# Altium PCB 256ch Adaptor PCB_TY.PcbDoc (part 2 of 2)
Units mm, origin at the board's own origin, x right, y up, seen from the top; angles counter-clockwise.
Board outline 152.4 x 101.6 mm, 4 copper layers (Top Layer, Signal Layer 1, Signal Layer 2, Bottom Layer), stack 0.778 mm thick; 1 components, 288 nets, 677 pads, 414 vias.
Unrouted connection lines stored in the file: 11.
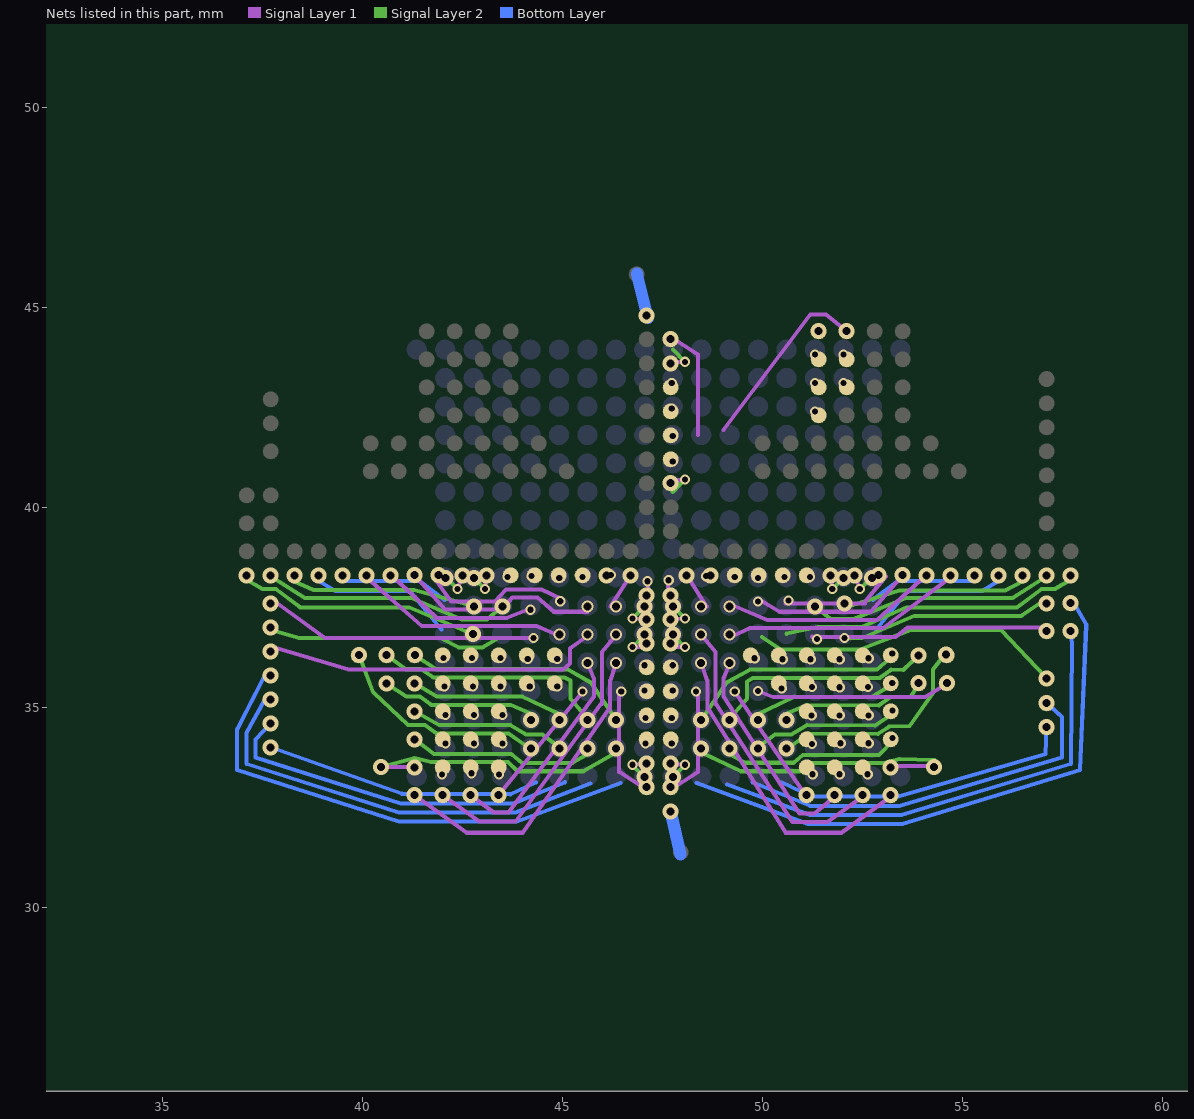
[diagram p4: the nets of this part, all layers, seen from the top]

## Via types
v1: diameter 0.254, hole 0.152, Top Layer to Bottom Layer, 167 vias
v2: diameter 0.4, hole 0.2, Top Layer to Bottom Layer, 77 vias
v3: diameter 0.4, hole 0.2, Top Layer to Signal Layer 1, 72 vias
v4: diameter 0.4, hole 0.2, Signal Layer 2 to Bottom Layer, 70 vias
v5: diameter 0.3, hole 0.2, Top Layer to Bottom Layer, 26 vias
v6: diameter 0.254, hole 0.152, Signal Layer 2 to Bottom Layer, 2 vias

## Nets (pads, with @x,y where several pads share a name; then routed paths per layer and width w, separated by ;. In a path a pad name is that pad's centre, name@x,y a point inside that pad or via, vN(x,y) a via of type N, cw(c..) or ccw(c..) an arc to the next point about the centre after c; other vN are vias at no path point) (continued)
IN114: pad.0@47.7,40.6 pad.0@48.057,40.691 | length 0.8
  Signal Layer 1 w0.102: v3@47.701,40.686 pad.0@48.057,40.686
  Signal Layer 2 w0.102: 47.752,40.381 pad.0@48.082,40.737
  other v1: 48.057,40.691
  other v3: 47.701,40.602
IN115: pad.0@51.4,42.3
  other v1: 51.308,42.393
IN116: pad.0@47.7,41.2
  other v1: 47.752,41.148
IN117: pad.0@52.1,43
  other v1: 52.019,43.104
IN118: pad.0@47.7,41.8
  other v1: 47.752,41.783
IN119: pad.0@51.4,43
  other v1: 51.308,43.104
IN120: pad.0@47.7,42.4
  other v1: 47.727,42.469
IN121: pad.0@52.1,43.7
  other v1: 52.019,43.815
IN122: pad.0@47.7,43
  other v1: 47.727,43.104
IN123: pad.0@51.4,43.7
  other v1: 51.308,43.815
IN124: pad.0@47.7,43.6 pad.0@48.057,43.632 pad.0@48.057,43.642 | length 0.8
  Signal Layer 1 w0.102: v3@47.701,43.632 pad.0@48.057,43.632
  Signal Layer 2 w0.102: 47.757,43.942 pad.0@48.062,43.637
  other v1: 48.057,43.637
  other v3: 47.701,43.599
IN125: pad.0@52.1,44.4 | length 4.7
  Signal Layer 1 w0.102: 49.022,41.935 51.194,44.825 51.575,44.825 v3@52.1,44.4
  other v3: 52.1,44.405
IN126: pad.0@47.7,44.2 pad.0@48.336,41.808 | length 2.8
  Signal Layer 1 w0.102: v3@47.696,44.266 48.387,43.815 pad.0@48.387,41.808
  other v3: 47.7,44.205
IN127: pad.0@51.4,44.4
  other v3: 51.4,44.405
IN128: pad.0@49.301,35.392 pad.0@51.1,32.8 | length 3.2
  Signal Layer 1 w0.102: v1(49.301,35.392) v3@51.093,32.775
  other v3: 51.1,32.805
IN129: pad.0@47.7,33 pad.0@48.336,35.392 | length 2.8
  Signal Layer 1 w0.102: v3@47.696,32.934 48.387,33.385 pad.0@48.387,35.392
  other v1: 48.336,35.392
  other v3: 47.7,33.005
IN130: pad.0@49.174,36.103 pad.0@51.8,32.8 | length 5.4
  Signal Layer 1 w0.102: 49.017,35.265 49.022,35.722 v5(49.174,36.103) ; 49.022,35.265 50.919,32.35 51.3,32.35 v3@51.846,32.8
  other v3: 51.8,32.805
IN131: pad.0@47.7,33.6 pad.0@48.057,33.563 pad.0@48.057,33.568 | length 0.8
  Signal Layer 1 w0.102: v3@47.701,33.568 pad.0@48.057,33.568
  Signal Layer 2 w0.102: v4@47.757,33.258 pad.0@48.062,33.563
  other v1: 48.057,33.563
  other v3: 47.701,33.601
  other v4: 47.752,33.258
IN132: pad.0@51.1,33.5
  other v1: 51.25,33.325
IN133: pad.0@47.7,34.2
  other v1: 47.727,34.096
IN134: pad.0@51.8,33.5
  other v1: 51.925,33.325
IN135: pad.0@47.7,34.8
  other v1: 47.727,34.731
IN136: pad.0@51.1,34.2
  other v1: 51.232,34.087
IN137: pad.0@47.7,35.4
  other v1: 47.752,35.417
IN138: pad.0@51.8,34.2
  other v1: 51.95,34.1
IN139: pad.0@47.7,36
  other v1: 47.752,36.052
IN140: pad.0@51.1,34.9
  other v1: 51.225,34.8
IN141: pad.0@47.7,36.6 pad.0@48.057,36.507 pad.0@48.057,36.514 | length 0.8
  Signal Layer 1 w0.102: v3@47.701,36.514 pad.0@48.057,36.514
  Signal Layer 2 w0.102: v4@47.752,36.819 pad.0@48.082,36.463
  other v1: 48.057,36.509
  other v3: 47.701,36.598
  other v4: 47.752,36.814
IN142: pad.0@51.8,34.9
  other v1: 51.925,34.8
IN143: pad.0@47.7,37.2 pad.0@48.057,37.22 pad.0@48.057,37.225 | length 0.8
  Signal Layer 1 w0.102: v3(47.701,37.2) pad.0@48.057,37.225
  Signal Layer 2 w0.102: v4@47.752,37.53 pad.0@48.057,37.225
  other v1: 48.057,37.22
  other v4: 47.752,37.525
IN144: pad.0@47.7,37.8 pad.0@47.65,38.176 | length 0.4
  Signal Layer 1 w0.102: v3@47.621,37.849 pad.0@47.646,38.126 ; v3@47.621,37.849 47.622,37.92 v3@47.65,37.891
  other v1: 47.65,38.176
  other v3: 47.701,37.8
IN145: pad.0@49.7,36.3
  other v1: 49.8,36.225
IN146: pad.0@48.1,38.3 pad.0@48.463,37.52 | length 0.9
  Signal Layer 1 w0.102: v3(48.1,38.3) pad.0@48.605,37.517
  other v5: 48.463,37.525
IN147: pad.0@50.4,35.6
  other v1: 50.475,35.475
IN148: pad.0@48.7,38.3
  other v1: 48.59,38.278
  other v3: 48.7,38.3
IN149: pad.0@50.4,36.3
  other v1: 50.5,36.2
IN150: pad.0@49.3,38.3
  other v1: 49.301,38.262
IN151: pad.0@51.1,36.3
  other v1: 51.2,36.2
IN152: pad.0@49.9,38.3
  other v1: 49.886,38.236
IN153: pad.0@51.1,35.6
  other v1: 51.233,35.506
IN154: pad.0@50.5,38.3
  other v1: 50.546,38.262
IN155: pad.0@51.8,36.3
  other v1: 51.925,36.2
IN156: pad.0@51.1,38.3
  other v1: 51.181,38.262
IN157: pad.0@51.8,35.6
  other v1: 51.925,35.5
IN158: pad.0@51.7,38.3 pad.0@51.74,37.957 pad.0@51.74,37.962 | length 0.7
  Signal Layer 1 w0.102: v3@51.7,38.305 pad.0@51.74,37.962
  Signal Layer 2 w0.102: pad.0@51.74,37.962 v4@52.019,38.241
  other v1: 51.74,37.957
  other v3: 51.7,38.3
  other v4: 52.019,38.236
IN159: pad.0@52.5,36.3
  other v1: 52.65,36.225
IN160: pad.0@52.3,38.3 pad.0@52.426,37.957 pad.0@52.426,37.962 | length 0.8
  Signal Layer 1 w0.102: v3@52.3,38.305 pad.0@52.426,37.962
  Signal Layer 2 w0.102: pad.0@52.426,37.962 v4@52.73,38.241
  other v1: 52.426,37.957
  other v3: 52.3,38.3
  other v4: 52.73,38.236
IN161: pad.0@50.648,37.678 pad.0@52.9,38.3 | length 2.8
  Signal Layer 1 w0.102: pad.0@50.571,37.592 52.553,37.592 ; 52.527,37.601 v3@53.077,38.273
  other v1: 50.648,37.668
  other v3: 52.9,38.305
IN162: pad.0@52.5,35.6
  other v1: 52.63,35.506
IN163: pad.0@49.886,37.652 pad.0@53.5,38.3 | length 4
  Signal Layer 1 w0.102: pad.0@49.962,37.668 50.419,37.389 52.705,37.389 ; 52.705,37.398 v3@53.5,38.3
  other v1: 49.886,37.643
  other v3: 53.5,38.305
IN164: pad.0@53.2,36.3 pad.0@53.239,36.344 | length 5.5
  Signal Layer 2 w0.102: v4(48.463,34.68) 49.098,35.62 49.682,35.941 52.857,35.941 pad.0@53.264,36.297
  other v1: 53.239,36.344
IN165: pad.0@49.174,37.535 pad.0@54.1,38.3 | length 5.3
  Signal Layer 1 w0.102: pad.0@49.276,37.541 50.114,37.186 52.857,37.186 v3@54.084,38.3
  other v3: 54.1,38.3
  other v5: 49.174,37.525
IN166: pad.0@53.2,35.6 pad.0@53.239,35.608 | length 3.7
  Signal Layer 2 w0.102: v4@49.784,34.782 50.8,35.265 52.706,35.252 pad.0@53.265,35.582
  other v1: 53.239,35.608
  other v4: 49.886,34.68
IN167: pad.0@49.174,36.814 pad.0@54.7,38.3 | length 6
  Signal Layer 1 w0.102: pad.0@49.251,36.779 49.682,36.982 53.01,36.982 v3@54.782,38.313
  other v3: 54.7,38.3
  other v5: 49.174,36.814
IN168: pad.0@53.9,36.3 pad.0@53.9,36.293 | length 5.7
  Signal Layer 2 w0.102: v4@49.149,34.68 49.606,35.214 49.606,35.636 49.759,35.738 52.934,35.738 53.213,35.941 53.519,35.938 v2(53.9,36.293)
  other v4: 49.174,34.68
IN169: pad.0@55.3,38.3 | length 2.7
  Bottom Layer w0.102: 52.76,37.685 53.391,38.16 v2@55.296,38.16
  other v2: 55.3,38.3
IN170: pad.0@53.9,35.6 pad.0@53.9,35.608 | length 3.7
  Signal Layer 2 w0.102: v4@50.521,34.807 51.105,35.061 52.909,35.049 53.188,35.252 53.696,35.265 pad.0@53.929,35.628
  other v2: 53.9,35.608
  other v4: 50.597,34.68
IN171: pad.0@55.9,38.3 | length 3.6
  Bottom Layer w0.102: 52.832,36.941 53.619,37.906 55.474,37.906 v2@55.905,38.16
  other v2: 55.9,38.3
IN172: pad.0@54.6,36.3 pad.0@54.585,36.319 | length 5.3
  Signal Layer 2 w0.102: v4@50.622,33.969 51.156,34.35 52.884,34.338 53.163,34.515 53.67,34.528 54.255,35.354 54.255,35.938 pad.0@54.539,36.306
  other v2: 54.585,36.319
  other v4: 50.597,33.969
IN173: pad.0@56.5,38.3 pad.0@56.501,38.297 | length 4.6
  Signal Layer 2 w0.102: v4@52.019,37.479 53.416,37.922 56.058,37.922 pad.0@56.505,38.147
  other v2: 56.5,38.3
  other v4: 52.045,37.592
IN174: pad.0@49.886,35.404 pad.0@54.6,35.6 pad.0@54.611,35.608 | length 4.9
  Signal Layer 1 w0.102: pad.0@49.899,35.404 50.267,35.252 54.052,35.252 pad.0@54.624,35.607
  other v1: 49.886,35.404
  other v2: 54.611,35.608
IN175: pad.0@57.1,38.3 | length 6.1
  Signal Layer 2 w0.102: v4(51.308,37.525) 51.689,37.211 52.273,37.211 53.569,37.728 56.236,37.728 pad.0@57.021,38.223
  other v2: 57.1,38.3
IN176: pad.0@57.7,38.3 | length 7.4
  Signal Layer 2 w0.102: 50.597,36.839 51.384,37.008 52.476,37.008 53.594,37.5 56.363,37.5 56.972,37.957 57.302,37.957 pad.0@57.704,38.186
  other v2: 57.7,38.3
IN177: pad.0@52.5,34.9
  other v1: 52.65,34.8
IN178: pad.0@57.1,37.6 | length 5.3
  Signal Layer 2 w0.102: v6(52.045,36.728) 52.476,36.728 53.797,37.287 56.464,37.287 pad.0@57.098,37.72
  other v2: 57.1,37.6
IN179: pad.0@53.2,34.9 pad.0@53.244,34.922 | length 3.7
  Signal Layer 2 w0.102: v4@49.868,33.991 50.317,34.325 50.724,34.325 51.105,34.553 52.807,34.541 pad.0@53.328,34.887
  other v1: 53.244,34.922
  other v4: 49.886,33.969
IN180: pad.0@57.7,37.6 | length 14.3
  Bottom Layer w0.102: 48.35,33.108 51.13,32.08 53.492,32.08 57.937,33.436 58.09,37.068 v2@57.734,37.678
  other v2: 57.694,37.613
IN181: pad.0@52.5,34.2
  other v1: 52.65,34.1
IN182: pad.0@51.359,36.678 pad.0@57.1,36.9 pad.0@57.1,36.903 | length 5.9
  Signal Layer 1 w0.102: 51.232,36.763 53.315,36.754 53.619,36.992 pad.0@57.048,36.992
  other v1: 51.359,36.703
  other v2: 57.1,36.903
IN183: pad.0@53.2,34.2 pad.0@53.244,34.236 | length 4.5
  Signal Layer 2 w0.102: v4@49.106,33.87 49.555,33.614 50.775,33.614 51.003,33.807 52.908,33.807 pad.0@53.272,34.187
  other v1: 53.244,34.236
  other v4: 49.174,33.969
IN184: pad.0@57.7,36.9 | length 12.3
  Bottom Layer w0.102: 49.112,33.066 51.181,32.309 53.467,32.309 57.709,33.588 57.734,36.611 57.683,36.916 v2(57.694,36.913)
IN185: pad.0@52.5,33.5
  other v1: 52.625,33.325
IN186: pad.0@57.1,35.725 | length 7.8
  Signal Layer 2 w0.102: 49.987,36.754 50.444,36.449 52.451,36.449 53.696,36.932 55.956,36.932 pad.0@57.066,35.756
  other v2: 57.1,35.725
IN187: pad.0@53.2,33.5 pad.0@54.266,33.525 | length 7
  Signal Layer 1 w0.102: v3@53.225,33.528 pad.0@54.28,33.528
  Signal Layer 2 w0.102: v4@48.496,33.856 49.454,33.401 50.927,33.401 51.156,33.604 53.035,33.604 53.416,33.706 pad.0@54.293,33.683
  other v2: 54.28,33.51
  other v3: 53.2,33.5
  other v4: 48.463,33.969
IN188: pad.0@57.1,35.1 | length 9.6
  Bottom Layer w0.102: 49.747,33.127 51.181,32.537 53.416,32.537 57.48,33.741 57.48,34.757 v2(57.094,35.113)
IN189: pad.0@48.463,36.814 pad.0@52.5,32.8 | length 7.4
  Signal Layer 1 w0.102: v5(48.463,36.814) 48.819,36.382 48.819,35.087 ; 48.819,35.112 50.74,32.135 51.629,32.135 v3@52.546,32.8
  other v3: 52.5,32.805
IN190: pad.0@57.1,34.5 | length 7.5
  Bottom Layer w0.102: 50.471,33.124 51.232,32.766 53.391,32.766 57.075,33.83 v2@57.094,34.505
  other v2: 57.094,34.513
IN191: pad.0@48.463,36.103 pad.0@53.2,32.8 | length 7.8
  Signal Layer 1 w0.102: v5(48.463,36.103) 48.608,35.672 ; 48.616,34.96 48.616,35.671 ; 48.623,34.984 50.573,31.863 51.97,31.863 v3@53.246,32.8
  other v3: 53.2,32.805
IN192: pad.0@41.3,32.8 pad.0@46.337,36.103 | length 8
  Signal Layer 1 w0.102: v3@41.3,32.8 42.601,31.863 43.998,31.863 46.177,34.984 ; 46.184,34.96 46.184,35.671 ; 46.192,35.672 v5(46.337,36.103)
  other v3: 41.3,32.805
IN193: pad.0@37.7,34 | length 6.9
  Bottom Layer w0.102: v2(37.7,34) 40.986,32.838 43.695,32.826 44.329,33.124
IN194: pad.0@42,32.8 pad.0@46.337,36.814 | length 7.6
  Signal Layer 1 w0.102: v3@42,32.8 42.932,32.142 43.821,32.142 45.981,35.112 ; 45.981,35.087 45.981,36.382 v5(46.337,36.814)
  other v3: 42,32.805
IN195: pad.0@37.7,34.6 | length 9
  Bottom Layer w0.102: v2(37.7,34.6) 37.32,34.198 37.32,33.741 40.952,32.598 43.771,32.598 45.053,33.127
IN196: pad.0@40.452,33.5 pad.0@41.3,33.5 | length 7
  Signal Layer 1 w0.102: v2(40.462,33.503) 41.308,33.503 v3@41.31,33.5
  Signal Layer 2 w0.102: v4@46.304,33.856 45.517,33.401 43.866,33.401 43.637,33.63 41.707,33.63 41.3,33.731 v2(40.462,33.503) ; v2(40.462,33.503) 40.462,33.484 v2(40.462,33.503)
  other v3: 41.3,33.5
  other v4: 46.337,33.969
IN197: pad.0@37.7,35.2 | length 10.8
  Bottom Layer w0.102: v2(37.7,35.2) 37.548,35.188 37.091,34.35 37.091,33.588 40.901,32.369 43.822,32.369 45.688,33.092
IN198: pad.0@42,33.5
  other v1: 41.986,33.325
IN199: pad.0@37.7,35.8 | length 12.6
  Bottom Layer w0.102: v2(37.7,35.8) 37.548,35.798 36.863,34.452 36.863,33.436 40.901,32.14 43.848,32.14 46.45,33.108
IN200: pad.0@41.3,34.2 pad.0@41.3,34.197 | length 4.7
  Signal Layer 2 w0.102: v2(41.3,34.2) 41.783,33.833 43.713,33.833 43.993,33.604 45.245,33.614 v4@45.694,33.87
  other v4: 45.626,33.969
IN201: pad.0@37.7,36.4 pad.0@45.626,36.814 | length 8.4
  Signal Layer 1 w0.102: pad.0@37.752,36.509 39.649,35.941 45.009,35.941 45.187,36.093 45.187,36.474 pad.0@45.56,36.744
  other v2: 37.7,36.4
  other v5: 45.626,36.814
IN202: pad.0@42,34.2
  other v1: 42.07,34.096
IN203: pad.0@37.7,37 | length 5.8
  Signal Layer 2 w0.102: v2@37.747,36.919 38.412,36.738 41.961,36.728 42.393,36.5 43.002,36.5 43.383,36.728
  other v2: 37.7,37
IN204: pad.0@41.3,34.9 | length 3.9
  Signal Layer 2 w0.102: pad.0@41.295,34.9 41.917,34.553 43.695,34.553 44.076,34.325 44.483,34.325 v4@44.932,33.991
  other v2: 41.3,34.9
  other v4: 44.914,33.969
IN205: pad.0@37.7,37.6 pad.0@44.254,36.738 | length 6.9
  Signal Layer 1 w0.102: pad.0@37.702,37.72 39.065,36.728 pad.0@44.247,36.728
  other v1: 44.272,36.728
  other v2: 37.7,37.6
IN206: pad.0@42,34.9
  other v1: 42.07,34.807
IN207: pad.0@37.1,38.3 | length 6
  Signal Layer 2 w0.102: pad.0@37.096,38.186 37.498,37.957 37.828,37.957 38.437,37.5 41.155,37.5 v4@42.781,36.814
  other v2: 37.1,38.3
  other v4: 42.755,36.833
IN208: pad.0@37.7,38.3 | length 6.1
  Signal Layer 2 w0.102: pad.0@37.779,38.223 38.564,37.728 41.231,37.728 42.476,37.195 43.111,37.195 v4(43.492,37.525)
  other v2: 37.7,38.3
IN209: pad.0@39.9,36.3 pad.0@39.911,36.306 | length 5.4
  Signal Layer 2 w0.102: pad.0@39.906,36.306 40.266,35.366 41.13,34.553 41.562,34.553 41.841,34.35 43.644,34.35 v4@44.178,33.969
  other v2: 39.911,36.306
  other v4: 44.203,33.969
IN210: pad.0@38.3,38.3 | length 4.6
  Signal Layer 2 w0.102: pad.0@38.295,38.147 38.768,37.932 41.282,37.932 v4@42.781,37.53
  other v2: 38.3,38.3
  other v4: 42.781,37.525
IN211: pad.0@40.6,35.6 | length 3.9
  Signal Layer 2 w0.102: pad.0@40.596,35.595 41.104,35.265 41.435,35.265 41.714,35.061 43.695,35.061 v4@44.279,34.807
  other v2: 40.6,35.6
  other v4: 44.203,34.68
IN212: pad.0@38.9,38.3 | length 3.6
  Bottom Layer w0.102: v2@38.895,38.16 39.326,37.906 41.181,37.906 41.968,36.941
  other v2: 38.9,38.3
IN213: pad.0@40.6,36.3 pad.0@40.596,36.306 | length 6
  Signal Layer 2 w0.102: v2(40.596,36.306) 41.079,35.95 41.46,35.95 41.765,35.747 45.041,35.747 45.194,35.671 45.194,35.214 v4@45.651,34.68
  other v4: 45.626,34.68
IN214: pad.0@39.5,38.3 | length 2.7
  Bottom Layer w0.102: v2@39.504,38.16 41.409,38.16 42.04,37.685
  other v2: 39.5,38.3
IN215: pad.0@41.3,36.3 pad.0@41.308,36.306 | length 5.7
  Signal Layer 2 w0.102: v2(41.308,36.306) 41.841,35.95 45.118,35.95 45.702,35.62 v4(46.337,34.68)
IN216: pad.0@40.1,38.3 | length 5.4
  Signal Layer 1 w0.102: v3@40.018,38.313 41.478,37.033 44.348,37.033 v5@44.914,36.789
  other v3: 40.1,38.3
  other v5: 44.914,36.814
IN217: pad.0@41.3,35.6 | length 3.9
  Signal Layer 2 w0.102: pad.0@41.308,35.595 41.866,35.265 44,35.265 v4@45.016,34.782
  other v2: 41.3,35.6
  other v4: 44.914,34.68
IN218: pad.0@40.7,38.3 pad.0@44.203,37.444 | length 3.9
  Signal Layer 1 w0.102: v3@40.716,38.3 41.841,37.246 ; 41.808,37.236 43.612,37.236 pad.0@44.12,37.44
  other v1: 44.196,37.44
  other v3: 40.7,38.3
IN219: pad.0@42,36.3
  other v1: 42.019,36.23
IN220: pad.0@41.3,38.3 pad.0@45.626,37.525 pad.0@45.633,37.53 | length 5
  Signal Layer 1 w0.102: v3@41.3,38.3 42.062,37.44 43.485,37.44 43.739,37.744 44.374,37.744 44.78,37.389 pad.0@45.618,37.389
  other v3: 41.3,38.305
  other v5: 45.626,37.525
IN221: pad.0@42,35.6
  other v1: 42.044,35.519
IN222: pad.0@41.9,38.3 pad.0@44.947,37.657 | length 3.7
  Signal Layer 1 w0.102: v3@41.757,38.274 42.215,37.643 43.307,37.643 43.586,37.948 44.475,37.948 pad.0@44.976,37.71
  other v1: 44.94,37.652
  other v3: 41.9,38.305
IN223: pad.0@42.7,36.3
  other v1: 42.73,36.23
IN224: pad.0@42.5,38.3 pad.0@42.374,37.957 pad.0@42.374,37.962 | length 0.8
  Signal Layer 1 w0.102: pad.0@42.374,37.962 v3@42.5,38.305
  Signal Layer 2 w0.102: v4@42.07,38.241 pad.0@42.374,37.962
  other v1: 42.374,37.957
  other v3: 42.5,38.3
  other v4: 42.07,38.236
IN225: pad.0@43.1,38.3 pad.0@43.06,37.957 pad.0@43.06,37.962 | length 0.7
  Signal Layer 1 w0.102: pad.0@43.06,37.962 v3@43.1,38.305
  Signal Layer 2 w0.102: v4@42.781,38.241 pad.0@43.06,37.962
  other v1: 43.06,37.957
  other v3: 43.1,38.3
  other v4: 42.781,38.236
IN226: pad.0@42.7,35.6
  other v1: 42.755,35.519
IN227: pad.0@43.7,38.3
  other v1: 43.619,38.262
IN228: pad.0@43.4,36.3
  other v1: 43.441,36.23
IN229: pad.0@44.3,38.3
  other v1: 44.221,38.278
IN230: pad.0@43.4,35.6
  other v1: 43.441,35.519
IN231: pad.0@44.9,38.3
  other v1: 44.914,38.236
IN232: pad.0@44.1,36.3
  other v1: 44.127,36.204
IN233: pad.0@45.5,38.3
  other v1: 45.499,38.262
IN234: pad.0@44.1,35.6
  other v1: 44.178,35.519
IN235: pad.0@46.1,38.3
  other v1: 46.203,38.303
  other v3: 46.1,38.3
IN236: pad.0@44.8,36.3
  other v1: 44.864,36.204
IN237: pad.0@46.7,38.3 pad.0@46.337,37.52 | length 0.9
  Signal Layer 1 w0.102: pad.0@46.195,37.517 v3(46.7,38.3)
  other v5: 46.337,37.525
IN238: pad.0@44.8,35.6
  other v1: 44.864,35.519
IN239: pad.0@47.1,37.8 pad.0@47.117,38.151 | length 0.2
  Signal Layer 1 w0.102: v1(47.117,38.151) v3@47.145,37.941 ; v3@47.145,37.941 v3@47.149,37.944 ; v3@47.145,37.941 v3@47.149,37.944 ; v3@47.145,37.941 v3@47.149,37.944
  other v3: 47.099,37.8
IN240: pad.0@46.743,37.22 pad.0@47.1,37.2 | length 0.8
  Signal Layer 1 w0.102: pad.0@46.743,37.225 v3(47.099,37.2)
  Signal Layer 2 w0.102: pad.0@46.743,37.225 v4@47.048,37.53
  other v1: 46.743,37.22
  other v4: 47.048,37.525
IN241: pad.0@42.7,34.9
  other v1: 42.781,34.807
IN242: pad.0@46.743,36.509 pad.0@47.1,36.6 | length 0.8
  Signal Layer 1 w0.102: pad.0@46.743,36.514 v3@47.099,36.514
  Signal Layer 2 w0.102: pad.0@46.718,36.463 v4@47.048,36.819
  other v1: 46.743,36.509
  other v3: 47.099,36.598
  other v4: 47.048,36.814
IN243: pad.0@43.4,34.9
  other v1: 43.492,34.807
IN244: pad.0@47.1,36
  other v1: 47.048,36.052
IN245: pad.0@42.7,34.2
  other v1: 42.781,34.096
IN246: pad.0@47.1,35.4
  other v1: 47.048,35.417
IN247: pad.0@43.4,34.2
  other v1: 43.492,34.096
IN248: pad.0@47.1,34.8
  other v1: 47.073,34.731
IN249: pad.0@42.7,33.5
  other v1: 42.723,33.35
IN250: pad.0@47.1,34.2
  other v1: 47.073,34.096
IN251: pad.0@43.4,33.5
  other v1: 43.409,33.325
IN252: pad.0@46.738,33.563 pad.0@46.743,33.568 pad.0@47.1,33.6 | length 0.8
  Signal Layer 1 w0.102: pad.0@46.743,33.568 v3@47.099,33.568
  Signal Layer 2 w0.102: pad.0@46.738,33.563 v4@47.043,33.258
  other v1: 46.743,33.563
  other v3: 47.099,33.601
  other v4: 47.048,33.258
IN253: pad.0@42.7,32.8 pad.0@45.626,36.103 | length 5.5
  Signal Layer 1 w0.102: v3@42.7,32.8 43.269,32.375 43.65,32.375 45.778,35.265 ; v5(45.626,36.103) 45.778,35.722 45.783,35.265
  other v3: 42.7,32.805
IN254: pad.0@46.464,35.392 pad.0@47.1,33 | length 2.8
  Signal Layer 1 w0.102: pad.0@46.413,35.392 46.413,33.385 v3@47.104,32.934
  other v1: 46.464,35.392
  other v3: 47.1,33.005
IN255: pad.0@43.4,32.8 pad.0@45.499,35.392 | length 3.3
  Signal Layer 1 w0.102: v3@43.416,32.826 v1(45.499,35.392)
  other v3: 43.4,32.805
MISO1+: 
MISO1-: 
MISO2+: 
MISO2-: 
MISO3+: 
MISO3-: 
MISO4+: 
MISO4-: 
MOSI3+: 
MOSI3-: 
MOSI+: 
MOSI-: 
NetC2_1: 
NetC3_1: 
NetC5_1: 
NetC6_1: 
NetLED1_2: 
REF:  | length 2.3
  Bottom Layer w0.3: 46.855,45.844 v2@47.13,44.73 ; v2@47.697,32.411 47.946,31.318
  other v2: 47.7,32.4 47.1,44.8
SCLK3+: 
SCLK3-: 
SCLK+: 
SCLK-: 
VDD3: 
pads on no net: ?.0 ?.1 ?.2 ?.3 ?.4 ?.5 ?.6 ?.7 ?.8 ?.9 ?.10 ?.11 ?.12 ?.13 ?.14 ?.15 ?.16 ?.17 ?.18 ?.19 ?.20 ?.21 ?.22 ?.23 ?.24 ?.25 ?.26 ?.27 ?.28 ?.29 ?.30 ?.31 ?.32 ?.33 ?.34 ?.35 ?.36 ?.37 ?.38 ?.39 ?.40 ?.41 ?.42 ?.43 ?.44 ?.45 ?.46 ?.47 ?.48 ?.49 ?.50 ?.51 ?.52 ?.53 ?.54 ?.55 ?.56 ?.57 ?.58 ?.59 ?.60 ?.61 ?.62 ?.63 ?.64 ?.65 ?.66 ?.67 ?.68 ?.69 ?.70 ?.71 ?.72 ?.73 ?.74 ?.75 ?.76 ?.77 ?.78 ?.79 ?.80 ?.81 ?.82 ?.83 ?.84 ?.85 ?.86 ?.87 ?.88 ?.89 ?.90 ?.91 ?.92 ?.93 ?.94 ?.95 ?.96 ?.97 ?.98 ?.99 ?.100 ?.101 ?.102 ?.103 ?.104 ?.105 ?.106 ?.107 ?.108 ?.109 ?.110 ?.111 ?.112 ?.113 ?.114 ?.115 ?.116 ?.117 ?.118 ?.119 ?.120 ?.121 ?.122 ?.123 ?.124 ?.125 ?.126 ?.127 ?.128 ?.129 ?.130 ?.131 ?.132 ?.133 ?.134 ?.135 ?.136 ?.137 ?.138 ?.139 ?.140 ?.141 ?.142 ?.143 ?.144 ?.145 ?.146 ?.147 ?.148 ?.149 ?.150 ?.151 ?.152 ?.153 ?.154 ?.155 ?.156 ?.157 ?.158 ?.159 ?.160 ?.161 ?.162 ?.163 ?.164 ?.165 ?.166 ?.167 ?.168 ?.169 ?.170 ?.171 ?.172 ?.173 ?.174 ?.175 ?.176 ?.177 ?.178 ?.179 ?.180 ?.181 ?.182 ?.183 ?.184 ?.185 ?.186 ?.187 ?.188 ?.189 ?.190 ?.191 ?.192 ?.193 ?.194 ?.195 ?.196 ?.197 ?.198 ?.199 ?.200 ?.201 ?.202 ?.203 ?.204 ?.205 ?.206 ?.207 ?.208 ?.209 ?.210 ?.211 ?.212 ?.213 ?.214 ?.215 ?.216 ?.217 ?.218 ?.219 ?.220 ?.221 ?.222 ?.223 ?.224 ?.225 ?.226 ?.227 ?.228 ?.229 ?.230 ?.231 ?.232 ?.233 ?.234 ?.235 ?.236 ?.237 ?.238 ?.239 ?.240 ?.241 ?.242 ?.243 ?.244 ?.245 ?.246 ?.247 ?.248 ?.249 ?.250 ?.251 ?.252 ?.253 ?.254 ?.255
copper on no net: | length 63.8
  Top Layer w0.1: 32.992,27.698 33.5,26.174 ; 32.992,49.65 33.5,51.173 ; 33.4,26.174 33.6,26.174 ; 33.4,51.173 33.6,51.173 ; 33.5,33.622 33.5,26.174 ; 33.5,43.725 33.5,51.173 ; 34.008,27.698 33.5,26.174 ; 34.008,49.649 33.5,51.173
  Signal Layer 1 w0.102: v5(48.463,40.386) 48.819,40.818 48.819,42.088 ; v5(48.463,41.097) 48.608,41.528 ; 48.616,41.529 48.616,42.24 ; 49.017,41.935 49.022,41.478 v5(49.174,41.097) ; v1(49.301,41.808) 51.384,44.374 ; v1@49.987,40.437 50.241,40.691 54.966,40.691 57.098,39.48
  Signal Layer 2 w0.102: v4(51.308,39.675) 51.689,40.005 52.324,40.005 53.569,39.472 56.236,39.472 57.021,38.977 ; v4@52.019,39.67 53.518,39.268 56.032,39.268 56.505,39.053 ; v4@52.019,40.386 53.645,39.7 56.363,39.7 56.972,39.243 57.302,39.243 57.704,39.014
  Signal Layer 2 w0.762: v4@41.321,33.165 41.605,32.41
  Bottom Layer w0.102: v2@37.7,42.707 37.72,42.875 41.072,44.374 43.663,44.374 44.323,44.089 ; 52.76,39.515 53.391,39.04 55.296,39.04
  other v1: 49.936,39.573 50.673,39.573 50.673,40.335 43.409,40.437 49.886,40.437 44.907,41.808 48.336,41.808
  other v2: 37.7,41.4 37.7,42.7
  other v4: 53.492,33.249 41.427,33.274 43.459,36.779 49.911,36.779 52.019,38.964 52.73,38.964 47.752,39.675 52.019,39.675 52.045,40.367 47.752,40.386 48.463,42.52 49.174,42.52 49.886,42.52 50.597,42.52 48.463,43.231 49.174,43.231 49.886,43.231 50.597,43.231 41.3,43.942 47.752,43.942
  other v5: 48.463,39.675 49.174,39.675 49.174,40.386
  other v6: 50.622,36.779

## Polygon pours and split planes (outlines as drawn)
GND on Signal Layer 1 "Signal Layer 1-No Net" (solid, remove dead copper, pour order 0): 34.341,51.105 34.976,51.74 61.163,51.74 61.163,25.806 61.062,25.705 61.036,25.73 32.233,25.73
GND on Signal Layer 2 "Signal Layer 2-No Net" (solid, remove dead copper, pour order 2): 32.614,25.629 63.246,25.629 63.754,26.137 62.306,27.584 62.306,52.807 33.782,52.807 33.477,52.502
GND on Bottom Layer "Bottom layer-No Net" (solid, remove dead copper, pour order 4): 34.188,52.324 34.671,51.841 63.602,51.841 63.602,25.933 63.475,25.806 32.766,25.806

## Keep-outs
Keep-Out Layer:
  circle w0.1: c47.4,47.1 r1.02
  circle w0.1: c53.4,30.1 r1.02
  circle w0.1: c47.4,30.1 r1.02
  circle w0.1: c41.4,30.1 r1.02
  circle w0.1: c53.4,47.1 r1.02
  circle w0.1: c41.4,47.1 r1.02
  lines w0.1: 34.967,39.897 cw(c47.4,38.6) 43.631,26.682 ccw(c42.4,27.1) 41.255,27.715 cw(c47.4,38.6) 34.968,37.301 ccw(c34.9,38.6) 34.968,39.898

## Other copper
Top Layer:
  text "25 (mm)" at 34.362,33.876 h1.52 r90

## Silkscreen, mask and mechanical layers (free items; w line width, h text height)
Bottom Overlay:
  text "Dartmouth" at 42.525,50.425 h1.2 r180
  text "256 Ch" at 39.675,42.75 h1.46 r90
  text "Ball up / on this side" at 54.025,32.45 h0.88 r270
  text "TY Bai" at 50.875,26.525 h1.2